# Altium PCB PCB.pcbdoc
Units mm, origin at the board's own origin, x right, y up, seen from the top; angles counter-clockwise.
Board outline 147.7 x 162.56 mm, 2 copper layers (Top Layer, Bottom Layer); 16 components, 32 nets, 66 pads, 9 vias.
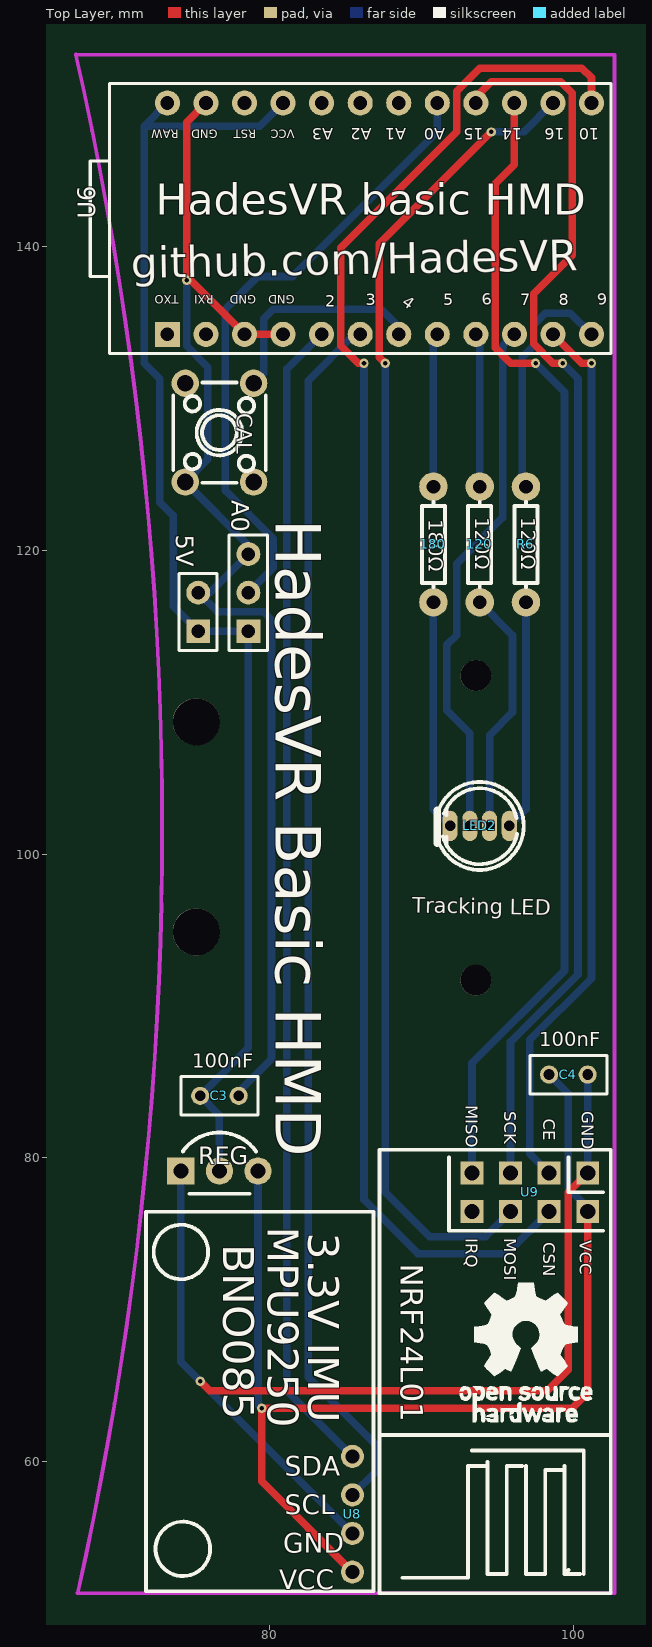
[diagram p0: Top Layer view]
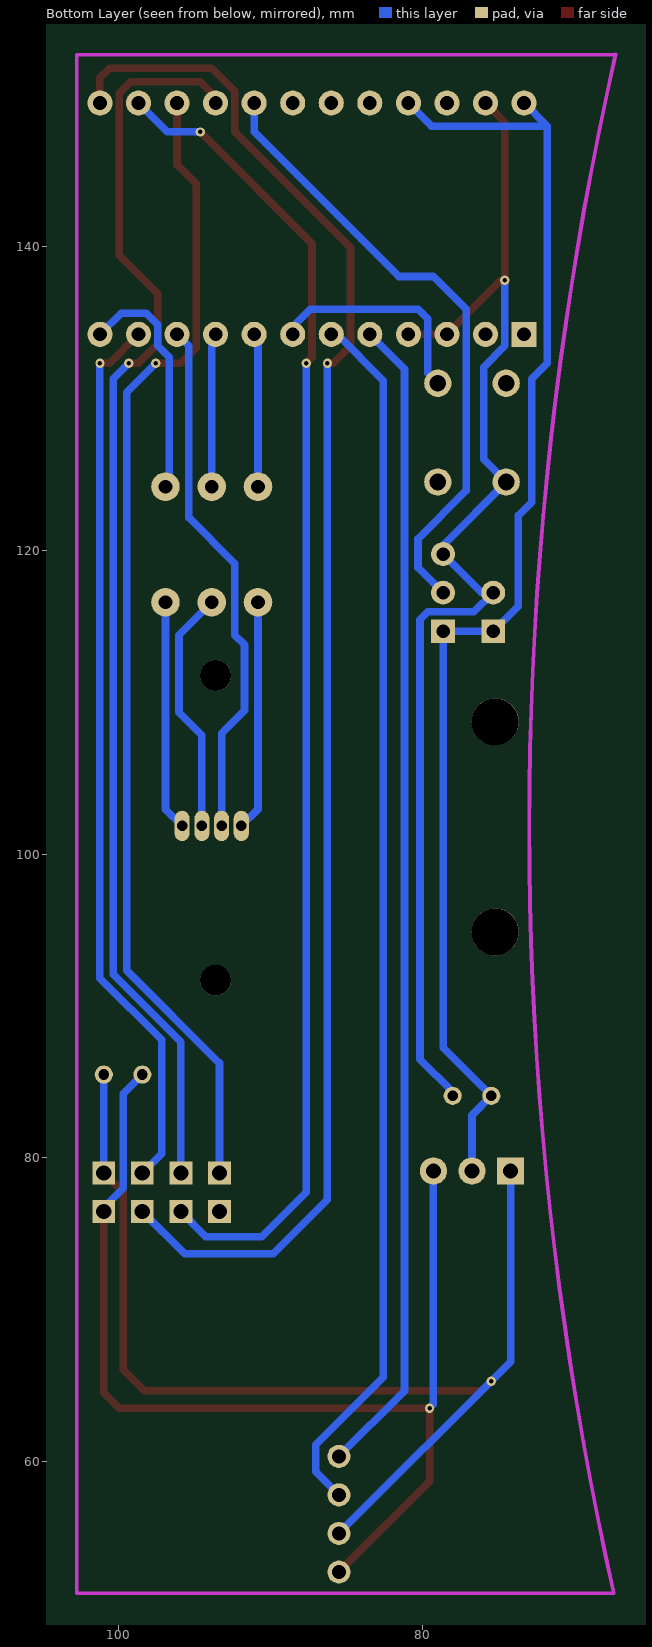
[diagram p1: Bottom Layer view, seen from below]

## Layer stack, top to bottom
Top Layer: signal copper (thickness not stored)
Dielectric: dielectric 0.32, FR-4, Dk 4.8
Bottom Layer: signal copper (thickness not stored)

## Board outline
173.101,25.4 25.4,25.4 25.4,187.96 173.101,187.96

## Components (designator, comment, footprint, x,y, rotation, side; value= is the part's Value field where it differs from the comment)
5V "HDR-F-2.54_1x2" HDR-F-2.54_1X2 75.311,115.951 r90 top
120 "1k" R_AXIAL-0.3 93.853,120.396 r90 top
180 "1k" R_AXIAL-0.3 90.805,120.396 r90 top
#LOGO3 "Graphic_Logo_Open_Hardware_Small" OPEN_HARDWARE -66.675,141.478 r0 top
A0 "HDR-M-2.54_1x3" HDR-M-2.54_1X3 78.613,117.221 r90 top
C3 "100nF" RAD-0.1 76.708,84.074 r180 top
C4 "100nF" RAD-0.1 99.694,85.472 r180 top
CAL "K4-6×6_TH" KEY-TH_4P-L6.0-W6.0-P4.50-LS6.5 76.708,127.762 r90 top
LED2 "φ5 RGB Transparent" LED-TH_4P-BD5.8-P1.30 93.853,101.854 r180 top
R6 "1k" R_AXIAL-0.3 96.901,120.396 r90 top
REG "TO-92-3_L4.9-W3.7-P2.54-L" TO-92-3_L4.9-W3.7-P2.54-L 76.708,79.121 r0 top
U6 "Arduino Pro Micro" ARDUINO_PRO_MICRO 73.279,134.239 r90 top
U8 "MPU9250" MPU9250 85.471,57.785 r180 top
U9 "NRF24L01" ?#1 100.965,78.994 r90 top
? "" ?#2 107.893,101.728 r0 top
? "" ?#2 85.026,156.45 r0 top

## Footprints (in the part's own frame and the unit in brackets; to place one, negate y for a bottom-side part, rotate by r counter-clockwise, add the part's x,y. Pads: shape width x height; smd on the part's side, far side on the other; paste and mask are expansions set on the pad)
ARDUINO_PRO_MICRO [mil]
  rect 65x65 hole 35.43: 1(0,0)
  round 65 hole 35.43: 2(0,-100) 3(0,-200) 4(0,-300) 5(0,-400) 6(0,-500) 7(0,-600) 8(0,-700) 9(0,-800) 10(0,-900) 11(0,-1000) 12(0,-1100) 13(600,-1100) 14(600,-1000) 15(600,-900) 16(600,-800) 17(600,-700) 18(600,-600) 19(600,-500) 20(600,-400) 21(600,-300) 22(600,-200) 23(600,-100) 24(600,0)
  silkscreen extent -50,-1150 650,200
HDR-F-2.54_1X2 [mil]
  rect 62x62 hole 35: 1(-50,0)
  round 62 hole 35: 2(50,0)
  silkscreen extent -100,-49 100,50
HDR-M-2.54_1X3 [mil]
  rect 62x62 hole 35: 1(-100,0)
  round 62 hole 35: 2(0,0) 3(100,0)
  silkscreen extent -150,-50 150,50
KEY-TH_4P-L6.0-W6.0-P4.50-LS6.5 [mm]
  round 1.8 hole 1.1: 1(-3.251,-2.25) 2(3.251,-2.25) 3(3.251,2.25) 4(-3.251,2.25)
  silkscreen extent -3.3,-3.05 3.3,3.05
LED-TH_4P-BD5.8-P1.30 [mm]
  oval 1x2 hole 0.7: 1(1.95,0) 2(0.65,0) 3(-0.65,0) 4(-1.95,0)
  silkscreen extent -2.9,-2.9 2.9,2.9
MPU9250 [mil]
  round 60 hole 36: 1(0,200) 2(0,100) 3(0,0) 4(0,-100)
  silkscreen extent -55,-734 536,250
OPEN_HARDWARE [mm]
  silkscreen extent 159.2,-78.92 167.94,-69.72
R_AXIAL-0.3 [mil]
  round 74 hole 35.4: 1(-150,0) 2(150,0)
  silkscreen extent -110,-30 110,30
RAD-0.1 [mil]
  round 47 hole 28: 1(-50,0) 2(50,0)
  silkscreen extent -100,-50 100,50
TO-92-3_L4.9-W3.7-P2.54-L [mm]
  rect 1.8x1.8 hole 1: 1(-2.54,0)
  round 1.8 hole 1: 2(0,0) 3(2.54,0)
  silkscreen extent -2.41,-1.5 2.41,2.54
?#1 [mm]
  rect 1.501x1.501 hole 1.001: 1(0,0) 2(-2.54,0) 3(0,2.54) 4(-2.54,2.54) 5(0,5.08) 6(-2.54,5.08) 7(0,7.62) 8(-2.54,7.62)
  silkscreen extent -27.69,-1.52 1.52,13.72
?#2 [mm]

## Free pads (board coordinates)
  round 3.1 hole 3.1 unplated: ""(75.184,94.869) ""(75.184,108.712)
  round 2.032 hole 2.032 unplated: ""(93.599,91.694) ""(93.599,111.76)

## Via types
v1: diameter 0.61, hole 0.305, Top Layer to Bottom Layer, 9 vias

## Nets (pads, with @x,y where several pads share a name; then routed paths per layer and width w, separated by ;. In a path a pad name is that pad's centre, name@x,y a point inside that pad or via, vN(x,y) a via of type N, cw(c..) or ccw(c..) an arc to the next point about the centre after c; other vN are vias at no path point)
3V3HMD: C4.2 REG.3 U8.1 U9.2 | length 72.6
  Top Layer w0.5: v1(79.502,63.5) 79.502,58.674 U8.1 ; v1@79.756,63.5 99.949,63.5 100.965,64.516 U9.2
  Bottom Layer w0.5: REG.3 79.247,63.755 v1(79.502,63.5) ; C4.2 99.695,84.201 99.695,77.978 100.965,76.708 U9.2
A0: A0.2 U6.17 | length 41.4
  Bottom Layer w0.5: A0.2 80.264,118.872 80.264,120.777 77.089,123.952 77.089,135.89 79.248,138.049 81.534,138.049 91.059,147.574 U6.17
B: R6.2 U6.12 | length 15.9
  Bottom Layer w0.5: R6.2 96.646,124.207 96.646,132.716 97.408,133.478 97.408,134.875 98.17,135.637 99.821,135.637 U6.12
CAL: CAL.2 U6.7 | length 14.7
  Bottom Layer w0.5: CAL.2 79.629,131.684 79.629,135.255 80.264,135.89 87.376,135.89 88.519,134.747 U6.7
CAL_1: CAL.1
CAL_3: CAL.3
CEHMD: U6.11 U9.3 | length 58.9
  Top Layer w0.5: U6.11 100.584,132.334 v1(101.219,132.334)
  Bottom Layer w0.5: U9.3 97.154,80.265 97.154,87.758 101.218,91.822 v1(101.219,132.334)
CSNHMD: U6.13 U9.4 | length 103.3
  Top Layer w0.5: v1(86.233,132.334) 85.852,132.334 84.709,133.477 84.709,139.954 92.329,147.574 92.329,150.241 93.853,151.765 100.584,151.765 101.219,151.13 U6.13
  Bottom Layer w0.5: v1(86.233,132.334) 86.233,77.216 89.789,73.66 95.631,73.66 U9.4
D1_1: 180.1 LED2.1 | length 15.2
  Bottom Layer w0.5: 180.1 90.805,102.952 LED2.1
D1_3: 120.1 LED2.3 | length 16.3
  Bottom Layer w0.5: 120.1 96.011,114.428 96.011,109.348 94.502,107.839 LED2.3
D1_4: LED2.4 R6.1 | length 15.2
  Bottom Layer w0.5: LED2.4 96.901,102.952 R6.1
G: 120.2 U6.9 | length 10.1
  Bottom Layer w0.5: U6.9 93.853,133.985 120.2
HMDGND: 5V.2 A0.3 C3.1 C4.1 CAL.4 REG.1 U6.3 U6.4 U6.23 U8.2 U9.1 | length 156.8
  Top Layer w0.5: v1(75.437,65.279) 76.072,64.644 98.297,64.644 99.694,66.041 99.694,77.725 U9.1 ; U6.23 74.549,148.209 v1(74.549,137.795) 74.803,137.795 U6.3 U6.4
  Bottom Layer w0.5: REG.1 74.167,66.549 U8.2 ; v1(74.549,137.795) 74.549,133.477 75.946,132.08 75.946,125.999 CAL.4 78.613,120.355 A0.3 76.073,117.221 5V.2 ; 5V.2 76.58,115.952 79.628,115.952 80.136,115.444 80.136,86.488 77.977,84.329 C3.1 ; U9.1 C4.1
LEDHMD: LED2.2 U6.10 | length 34.9
  Bottom Layer w0.5: LED2.2 93.202,107.966 91.693,109.475 91.693,113.793 92.328,114.428 92.328,119.127 95.376,122.175 95.376,133.478 U6.10
MISOHMD: U6.15 U9.7 | length 76.4
  Top Layer w0.5: U6.15 96.139,145.415 94.869,144.145 94.869,133.35 95.885,132.334 v1(97.536,132.334)
  Bottom Layer w0.5: U9.7 93.344,86.234 99.44,92.33 99.44,130.43 v1(97.536,132.334)
MOSIHMD: U6.14 U9.6 | length 88.1
  Top Layer w0.5: v1(87.63,132.334) 87.248,132.716 87.248,140.209 v1(94.614,147.575)
  Bottom Layer w0.5: v1(87.63,132.334) 87.63,77.724 90.551,74.803 94.234,74.803 U9.6 ; v1(94.614,147.575) 96.775,147.575 U6.14
R: 180.2 U6.8 | length 10.1
  Bottom Layer w0.5: 180.2 90.805,133.985 U6.8
S$17: 
S$20761: 
S$20763: 
S$58210: 
SCKHMD: U6.16 U9.5 | length 83.1
  Top Layer w0.5: U6.16 93.598,149.861 94.614,150.877 99.186,150.877 99.948,150.115 99.948,139.447 97.408,136.907 97.408,133.605 98.678,132.335 v1(99.314,132.334)
  Bottom Layer w0.5: U9.5 95.884,87.631 100.329,92.076 100.329,131.319 v1(99.314,132.334)
U6_1: U6.1
U6_2: U6.2
U6_18: U6.18
U6_19: U6.19
U6_20: U6.20
U6_22: U6.22
U8_3: U6.6 U8.3 | length 80.6
  Bottom Layer w0.5: U8.3 86.994,59.31 86.994,61.088 82.549,65.533 82.549,131.192 85.597,134.24 U6.6
U8_4: U6.5 U8.4 | length 76.6
  Bottom Layer w0.5: U6.5 81.152,131.954 81.152,64.644 U8.4
U9_8: U9.8
VCC: 5V.1 A0.1 C3.2 REG.2 U6.21 U6.24 | length 87.4
  Bottom Layer w0.5: U6.24 71.755,147.955 ; REG.2 76.708,82.804 C3.2 78.613,87.249 A0.1 5V.1 73.66,116.332 73.66,122.301 72.771,123.19 72.771,131.318 71.755,132.334 71.755,147.955 ; U6.21 79.375,147.955 71.755,147.955

## Polygon pours and split planes (outlines as drawn)
HMDGND on Bottom Layer (solid): 40.386,39.37 159.131,39.37 160.401,38.1 160.401,173.228 158.369,175.26 40.259,175.26 38.1,173.101

## Keep-outs
Keep-Out Layer:
  lines w0.254 net S$20763: 67.247,152.669 cw(c-157.949,101.736) 72.879,96.65 ; 67.369,51.323 ccw(c-157.866,101.726) 72.886,96.757

## Silkscreen, mask and mechanical layers (free items; w line width, h text height)
Top Overlay:
  lines w0.5 net S$58210: 91.059,100.711 91.059,102.87
  text "HadesVR basic HMD" at 72.517,142.113 h2.03
  text "github.com/HadesVR" at 70.884,137.922 h2.03 r1
  text "120Ω" at 93.218,122.174 h1.6 r270
  text "120Ω" at 96.266,122.174 h1.6 r270
  text "HadesVR Basic HMD" at 80.415,122.047 h3 r270
  text "180Ω" at 90.17,122.047 h1.6 r270
  text "Tracking LED" at 89.399,96.147 h1 r359
  text "100nF" at 97.79,86.995 h1.6
  text "100nF" at 74.93,85.598 h1.6
  text "MPU9250" at 79.883,75.438 h2.03 r270
  text "3.3V IMU" at 82.55,75.057 h2.03 r270
  text "BNO085" at 76.962,74.295 h2.03 r270
Top Solder:
  rectangle: 87.757,61.595 102.616,61.722

## Text inside footprints (layer, text, board x,y; h text height)
U6: Top Overlay "9" at 101.633,136.145 h0.76 r5; Top Overlay "8" at 99.06,136.144 h0.76; Top Overlay "7" at 96.52,136.144 h0.76; Top Overlay "6" at 94.013,136.145 h0.76 r5; Top Overlay "5" at 91.44,136.144 h0.76; Top Overlay "4" at 88.681,136.213 h0.76 r325; Top Overlay "3" at 86.36,136.144 h0.76; Top Overlay "2" at 83.693,136.04 h0.76; Top Overlay "GND" at 81.661,136.804 h0.56 r180; Top Overlay "GND" at 79.121,136.804 h0.56 r180; Top Overlay "RXI" at 76.327,136.804 h0.56 r180; Top Overlay "TXO" at 74.041,136.804 h0.56 r180; Top Overlay "RAW" at 74.041,147.726 h0.56 r180; Top Overlay "GND" at 76.581,147.726 h0.56 r180; Top Overlay "RST" at 79.121,147.726 h0.56 r180; Top Overlay "VCC" at 81.661,147.726 h0.56 r180; Top Overlay "A3" at 84.201,147.828 h0.76 r180; Top Overlay "A2" at 86.741,147.828 h0.76 r180; Top Overlay "A1" at 89.027,147.828 h0.76 r180; Top Overlay "A0" at 91.567,147.828 h0.76 r180; Top Overlay "15" at 94.107,147.828 h0.76 r180; Top Overlay "14" at 96.647,147.828 h0.76 r180; Top Overlay "16" at 99.441,147.828 h0.76 r180; Top Overlay "10" at 101.727,147.828 h0.76 r180
U8: Top Overlay "VCC" at 80.645,51.562 h1.27; Top Overlay "GND" at 80.899,53.975 h1.27; Top Overlay "SCL" at 81.026,56.515 h1.27; Top Overlay "SDA" at 81.026,59.055 h1.27
U9: Top Overlay "IRQ" at 92.945,74.676 h0.8 r270; Top Overlay "MOSI" at 95.485,74.676 h0.8 r270; Top Overlay "CSN" at 98.025,74.422 h0.8 r270; Top Overlay "VCC" at 100.438,74.549 h0.8 r270; Top Overlay "MISO" at 92.945,83.439 h0.8 r270; Top Overlay "SCK" at 95.485,83.058 h0.8 r270; Top Overlay "CE" at 98.025,82.55 h0.8 r270; Top Overlay "GND" at 100.565,83.058 h0.8 r270